# EAGLE board t-rex (EAGLE 9.6.2)
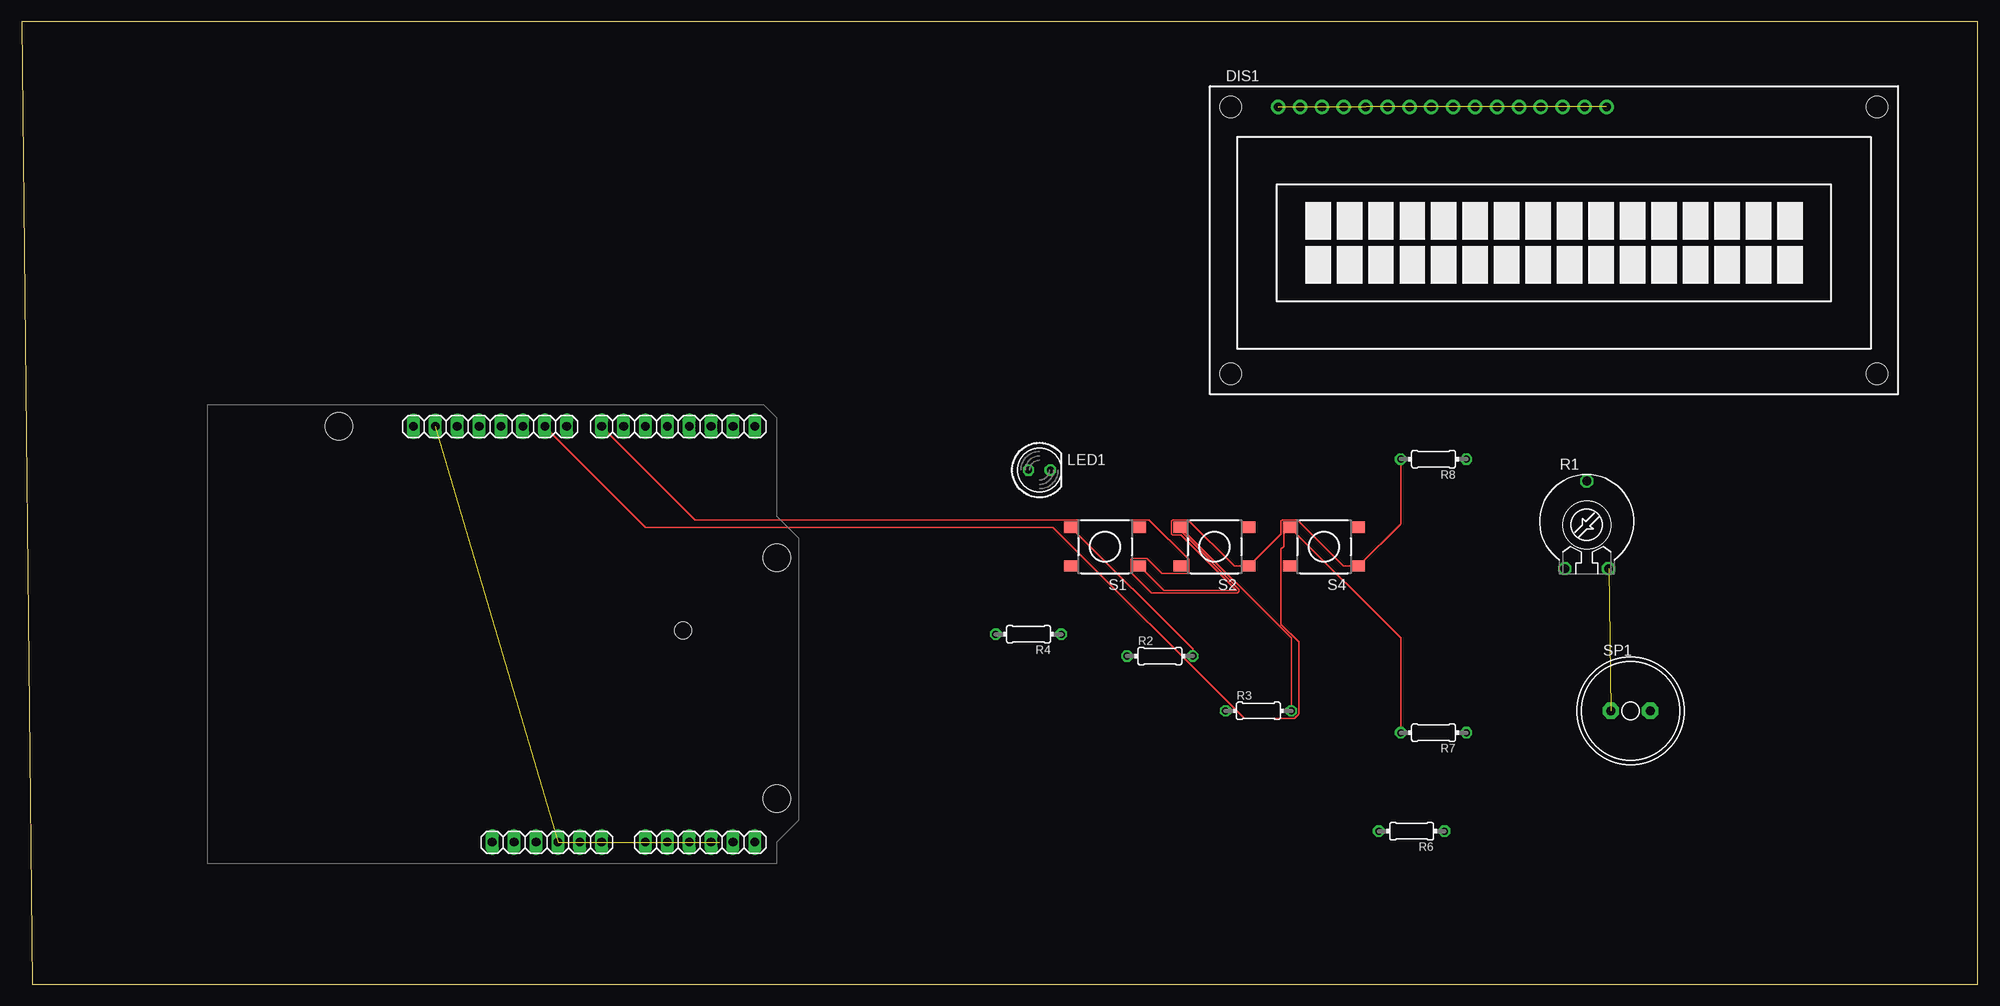
[diagram p0: board, top side]
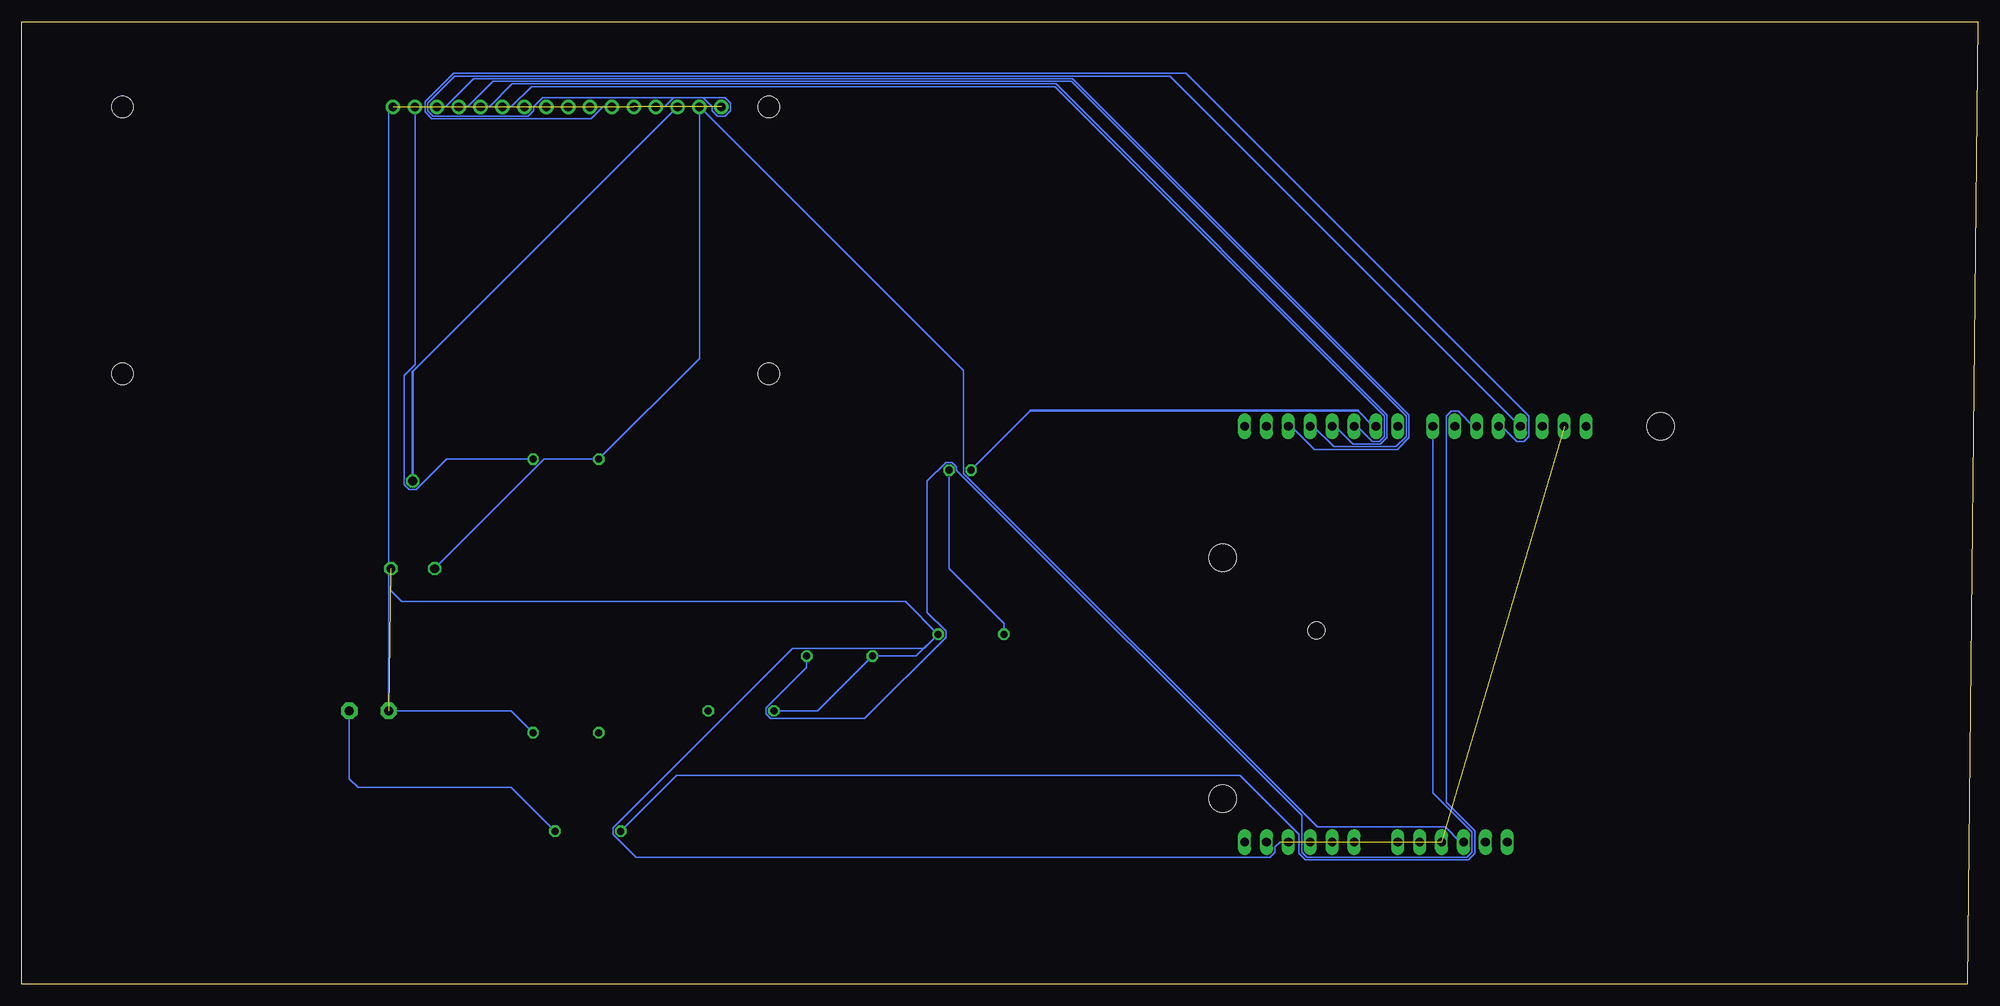
[diagram p1: board, bottom side, seen from below]

Size 227 x 111.75 mm. Coordinates in mm from the lower left corner, seen from the top.
Outline: 1.27,0 227,0 227,111.75 0,111.75 1.27,0
Copper layers (1*16): Top 0.035mm / dielectric 1.5mm / Bottom 0.035mm
Design rules "default": minimum track width 6mil, minimum drill 0.35mm, track to track 6mil, track to pad 6mil, pad to pad 6mil, via to via 6mil, smd to smd 6mil, copper to edge 40mil, drill to drill 6mil, minimum pad ring 10mil, minimum via ring 8mil, stop-mask expansion 4mil, vias tented up to drill 0mil, thermal gap 10mil

## Footprints (pad centres in the part's own frame; a part is rotated, then mirrored left to right if it is on the bottom)
TUXGR_16X2_R2 = drill 1 pad 1.676: 1 -32,15.5; 2 -29.46,15.5; 3 -26.92,15.5; 4 -24.38,15.5; 5 -21.84,15.5; 6 -19.3,15.5; 7 -16.76,15.5; 8 -14.22,15.5; 9 -11.68,15.5; 10 -9.14,15.5; 11 -6.6,15.5; 12 -4.06,15.5; 13 -1.52,15.5; 14 1.02,15.5; 15 3.56,15.5; 16 6.1,15.5 | hole 2.5: -37.5,-15.5; 37.5,-15.5; -37.5,15.5; 37.5,15.5
ARDUINO2009 = drill 1.016 long: 1 33.02,2.54; 2 35.56,2.54; 3 38.1,2.54; 4 40.64,2.54; 5 43.18,2.54; 6 45.72,2.54; 7 50.8,2.54; 8 53.34,2.54; 9 55.88,2.54; 10 58.42,2.54; 11 60.96,2.54; 12 63.5,2.54; 13 63.5,50.8; 14 60.96,50.8; 15 58.42,50.8; 16 55.88,50.8; 17 53.34,50.8; 18 50.8,50.8; 19 48.26,50.8; 20 45.72,50.8; 21 41.656,50.8; 22 39.116,50.8; 23 36.576,50.8; 24 34.036,50.8; 25 31.496,50.8; 26 28.956,50.8; 27 26.416,50.8; 28 23.876,50.8 | hole 3.2: 15.24,50.8; 66.04,35.56; 66.04,7.62 | hole 2: 55.17,27.114
LED5MM = drill 0.813 octagon: A -1.27,0; K 1.27,0
PT-10 = drill 1.016 octagon: A -2.54,-5.08; E 2.54,-5.08; S 0,5.08
0204/7 = drill 0.813 octagon: 1 -3.81,0; 2 3.81,0
DTSM-6 = smd 1.55 x 1.3: 1 -3.975,2.25; 2 3.975,2.25; 3 -3.975,-2.25; 4 3.975,-2.25
AL11P = drill 1.016 pad 1.905 octagon: + 2.286,0; - -2.286,0

## Placement (x,y rotation side)
DIS1  TUXGR_16X2_R2  [TUXGR_16X2_R2]  177.8,86.36 0 top
IC1  [ARDUINO2009]  21.59,13.97 0 top
LED1  [LED5MM]  118.11,59.69 0 top
R1  10k  [PT-10]  181.61,53.34 0 top
R2  100k  [0204/7]  132.08,38.1 0 top
R3  100k  [0204/7]  143.51,31.75 0 top
R4  200  [0204/7]  116.84,40.64 180 top
R6  1k  [0204/7]  161.29,17.78 180 top
R7  100k  [0204/7]  163.83,29.21 180 top
R8  200  [0204/7]  163.83,60.96 180 top
S1  DTSM-6  [DTSM-6]  125.73,50.8 180 top
S2  DTSM-6  [DTSM-6]  138.43,50.8 180 top
S4  DTSM-6  [DTSM-6]  151.13,50.8 180 top
SP1  AL11P  [AL11P]  186.69,31.75 0 top

## Library data of the parts
DIS1 = display-lcd; OC_FARNELL: unknown; OC_NEWARK: unknown
IC1 = arduino
LED1 = led
R1 = pot
R2-R4 R6-R8 = rcl; SPICEPREFIX: R
S1 S2 S4 = switch-tact
SP1 = buzzer; OC_FARNELL: unknown; OC_NEWARK: unknown

## Nets
+3V3: IC1.2
BUT_L: IC1.22 R7.2 S4.4
BUT_M: IC1.21 R2.2 S1.4
BUT_R: IC1.20 R3.2 S2.4
BUZ: IC1.23 R6.2
GND: DIS1.1 DIS1.5 DIS1.16 IC1.4 IC1.5 IC1.27 R1.E R2.1 R3.1 R4.1 R7.1 SP1.-
N$1: DIS1.14 IC1.15
N$2: DIS1.13 IC1.16
N$3: DIS1.12 IC1.17
N$4: IC1.19 LED1.A
N$5: DIS1.11 IC1.18
N$6: LED1.K R4.2
N$7: R6.1 SP1.+
N$8: DIS1.15 R8.1
PIN11: DIS1.6 IC1.24
PIN12: DIS1.4 IC1.25
POT: DIS1.3 R1.S
POW: DIS1.2 IC1.3 R1.A R8.2 S1.1 S2.1 S4.1

## Tracks (layer width: path | path; a pad name or v marks a point on that pad's centre or on a via)
BUT_L
  Top 0.152: R7.2 160.02,40.19 S4.4 146.46,52.35 146.46,50.85 146.15,50.55 146.15,41.78 148.21,39.73 148.21,31.38 147.69,30.86 141.87,30.86 119.68,53.05 72.43,53.05 IC1.22
BUT_M
  Top 0.152: S1.4 135.89,38.91 R2.2
  Bottom 0.152: R2.2 135.89,36.82 140.59,32.12 140.59,31.38 140.07,30.86 129.17,30.86 119.76,40.27 119.76,41.01 121.92,43.17 121.92,58.41 119.75,60.58 119.01,60.58 118.49,60.06 118.49,59.65 78.46,19.62 78.46,15.34 77.88,14.76 59.28,14.76 58.7,15.34 58.7,17.68 63.25,22.23 IC1.21
BUT_R
  Top 0.152: R3.2 147.32,40.19 S2.4 134.46,52.67 141.28,45.85 141.28,45.59 141.1,45.42 131.09,45.42 128.7,47.8 128.7,49.3 128.84,49.43 130.57,49.43 132.33,47.67 135.32,47.67 135.46,47.8 135.46,49.3 130.82,53.93 78.15,53.93 IC1.20
BUZ
  Bottom 0.152: IC1.23 58.54,64.77 60.3,66.52 61.12,66.52 61.7,65.94 61.7,21.11 58.4,17.81 58.4,15.21 59.15,14.45 78.01,14.45 78.77,15.21 78.77,17.43 85.62,24.28 150.98,24.28 R6.2
GND  (6 unrouted)
  Bottom 0.152: R4.1 124.46,44.45 182.88,44.45 184.15,45.72 R1.E | R4.1 123.19,38.1 R2.1 134.62,31.75 R3.1 | 81,16.51 81.56,15.95 81.56,15.34 82.14,14.76 155.72,14.76 158.37,17.41 158.37,18.15 137.53,38.99 122.3,38.99 R4.1 | R7.1 170.18,31.75 SP1.- 184.4,101.36 DIS1.16
N$1
  Bottom 0.152: IC1.15 79.63,64.77 76.97,62.1 67.38,62.1 66.02,63.47 66.02,66.07 105.06,105.12 174.53,105.12 177.79,101.86 DIS1.14
N$2
  Bottom 0.152: DIS1.13 175.25,101.86 172.3,104.81 105.19,104.81 66.32,65.94 66.32,63.6 67.51,62.41 74.73,62.41 77.09,64.77 IC1.16
N$3
  Bottom 0.152: DIS1.12 172.71,101.86 170.06,104.51 106.99,104.51 68.56,66.07 68.56,63.47 69.31,62.71 72.5,62.71 74.55,64.77 IC1.17
N$4
  Top 0.152: IC1.19 70.23,64.77
  Bottom 0.305: IC1.19 70.12,64.77 71.95,66.6 109.93,66.6 LED1.A
N$5
  Bottom 0.152: DIS1.11 170.17,101.86 167.83,104.2 107.12,104.2 68.86,65.94 68.86,63.6 69.44,63.02 70.26,63.02 72.01,64.77 IC1.18
N$6
  Bottom 0.152: LED1.K 119.38,48.26 113.03,41.91 R4.2
N$7
  Bottom 0.152: R6.1 170.18,22.86 187.96,22.86 188.98,23.88 SP1.+
N$8
  Bottom 0.152: DIS1.15 181.36,71.92 182.6,70.68 182.6,58.01 182.02,57.43 181.2,57.43 177.67,60.96 R8.1
PIN11
  Bottom 0.152: DIS1.6 159.53,101.86 160.9,100.49 179.39,100.49 180.19,101.29 180.19,102.43 176.89,105.73 91.88,105.73 52.09,65.94 52.09,63.6 52.68,63.02 53.5,63.02 55.25,64.77 IC1.24
PIN12
  Bottom 0.152: DIS1.4 152.39,101.86 151.32,102.93 147.9,102.93 146.87,101.89 146.87,101.42 146.24,100.79 145.36,100.79 144.73,101.42 144.73,102.3 145.36,102.93 166.56,102.93 167.59,101.89 167.59,101.42 168.22,100.79 179.26,100.79 179.89,101.42 179.89,102.3 176.77,105.42 93.74,105.42 IC1.25
POT
  Bottom 0.305: DIS1.3 181.61,71.13 R1.S
POW
  Top 0.152: R8.2 160.02,53.47 S4.1 153.4,48.55 148.03,53.93 146.28,53.93 146.15,53.8 146.15,52.3 S2.1 140.7,48.55 135.32,53.93 133.59,53.93 133.45,53.8 133.45,52.3 133.59,52.17 134.52,52.17 140.97,45.72 132.53,45.72 S1.1
  Bottom 0.152: IC1.3 60.07,16.51 61.82,18.26 76.67,18.26 117.73,59.32 117.73,71.25 DIS1.2 148.34,72.64 R8.2 166.37,60.96 R1.A